# EAGLE board h-bridge (EAGLE 5.06)

No outline drawn. Coordinates in mm, seen from the top.
Copper layers (1*16): Top 0.035mm / dielectric 1.5mm / Bottom 0.035mm
Design rules "default": minimum track width 10mil, minimum drill 24mil, track to track 8mil, track to pad 8mil, pad to pad 8mil, via to via 8mil, smd to smd 8mil, copper to edge 40mil, drill to drill 8mil, minimum pad ring 10mil, minimum via ring 8mil, stop-mask expansion 4mil, vias tented up to drill 0mil, thermal gap 10mil

## Footprints (pad centres in the part's own frame; a part is rotated, then mirrored left to right if it is on the bottom)
DIL08 = drill 0.813 long: 1 -3.81,-3.81; 2 -1.27,-3.81; 3 1.27,-3.81; 4 3.81,-3.81; 5 3.81,3.81; 6 1.27,3.81; 7 -1.27,3.81; 8 -3.81,3.81
TO220BV = drill 1.016 long: D 0,-2.54; G -2.54,-2.54; S 2.54,-2.54
TO220BH = drill 1.118 long: D 0,-6.35; G -2.54,-6.35; S 2.54,-6.35 | hole 3.302: 0,11.176

## Placement (x,y rotation side)
IC1  TC4428  [DIL08]  -29.21,-36.83 0 top
IC2  TC4428  [DIL08]  -29.21,-49.53 0 top
Q1  FQP47P06  [TO220BV]  -6.35,-13.97 0 top
Q2  FQP47P06  [TO220BV]  -6.35,-21.59 0 top
Q3  FQP50N06  [TO220BH]  -19.05,-20.32 0 top
Q4  FQP50N06  [TO220BH]  -31.75,-20.32 0 top

## Library data of the parts
IC1 IC2 = ic-package
Q1-Q4 = transistor-power

## Nets
+12V: IC1.6 IC2.6 Q1.S Q2.S
CONTROL-A: IC1.4 IC2.2
CONTROL-B: IC1.2 IC2.4
GND: IC1.3 Q3.S Q4.S
N$2: IC1.5 Q3.G
N$3: IC2.7 Q2.G
N$4: IC2.5 Q4.G
N$5: IC2.3
N$8: Q2.D Q4.D
N$9: Q1.D Q3.D
OUTA: IC1.7 Q1.G

## Tracks (layer width: path | path; a pad name or v marks a point on that pad's centre or on a via)
+12V  (3 unrouted)
CONTROL-A  (1 unrouted)
CONTROL-B  (1 unrouted)
GND  (2 unrouted)
N$2  (1 unrouted)
N$3  (1 unrouted)
N$4  (1 unrouted)
N$8  (1 unrouted)
N$9  (1 unrouted)
OUTA  (1 unrouted)